# Altium PCB PCB1.PcbDoc
Units mil, origin at the board's own origin, x right, y up, seen from the top; angles counter-clockwise.
Board outline 6000 x 4000 mil, 2 copper layers (Top Layer, Bottom Layer); 50 components, 42 nets, 217 pads, 0 vias.
Unrouted connection lines stored in the file: 153.
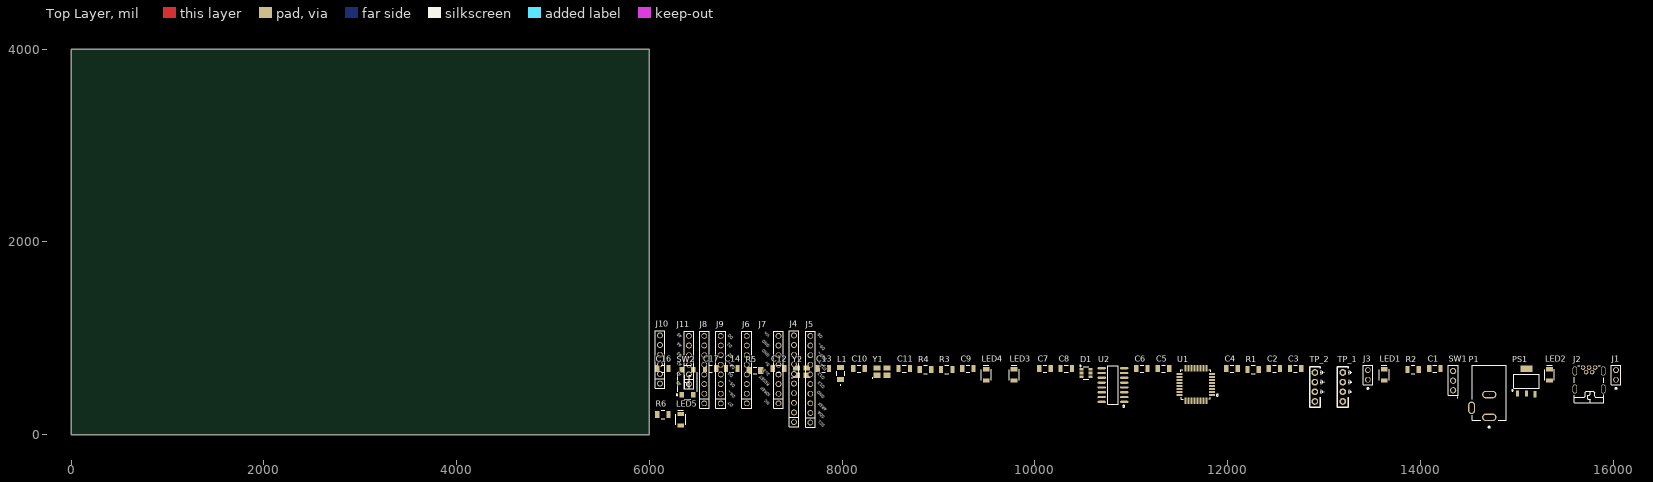
[diagram p0: Top Layer view]
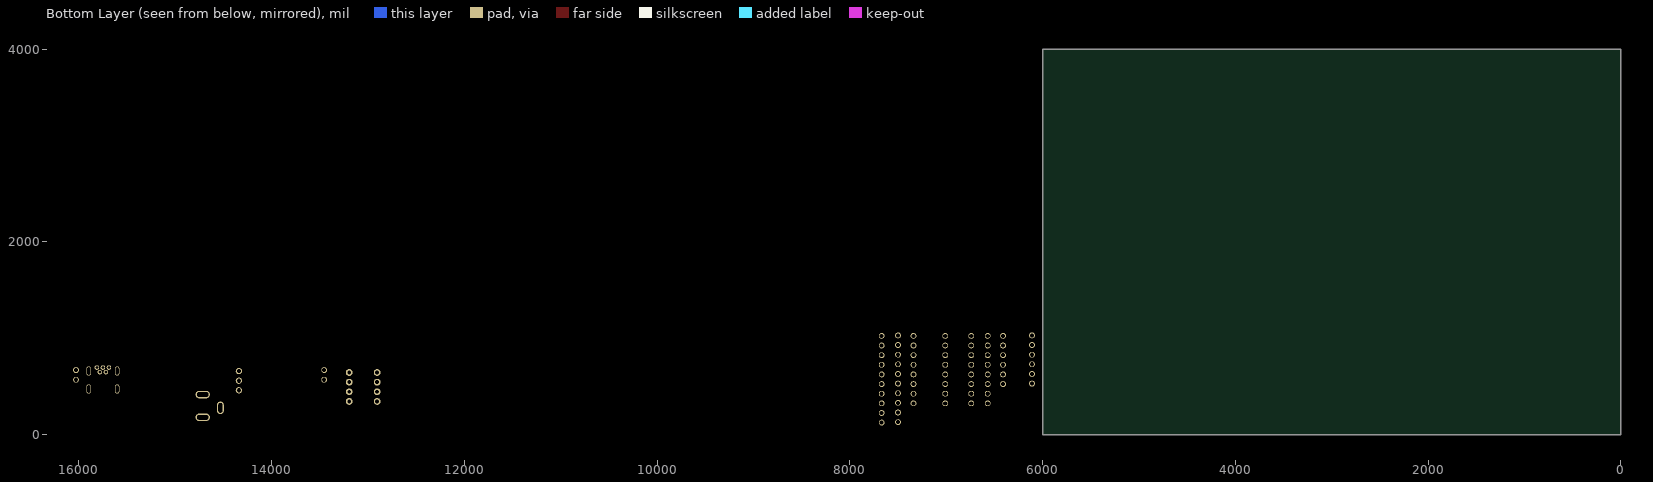
[diagram p1: Bottom Layer view, seen from below]

## Layer stack, top to bottom
Top Solder: solder mask 0.4, Solder Resist, Dk 3.5
Top Layer: signal copper 1.4
Dielectric 1: dielectric 12.6, FR-4, Dk 4.8
Bottom Layer: signal copper 1.4
Bottom Solder: solder mask 0.4, Solder Resist, Dk 3.5

## Board outline
0,0 6000,0 6000,4000 0,4000

## Design rules (kind name [scope] priority, off if disabled: settings)
Clearance [All] p1: gap=10 ignorepadtopadclearanceinfootprint=FALSE
PolygonConnect [All] p1: connectstyle=Relief reliefconductorwidth=10 reliefentries=4 polygonreliefangle="90 Angle" airgapwidth=10
RoutingVias [All] p1: holewidth=28 width=50 viastyle="Through Hole" minholewidth=28 minwidth=50 maxholewidth=28 maxwidth=50
SolderMaskExpansion [All] p1: expansion=4 istentingtop=FALSE
Width "Schematic Width Constraint_3" [InNet('5V_USB')] p1: maxlimit=30 minlimit=20 preferedwidth=20 minimp=50.000000 maximp=50.000000 favimp=50.000000
Width "Schematic Width Constraint_2" [InNet('3.3V')] p2: maxlimit=30 minlimit=20 preferedwidth=20 minimp=50.000000 maximp=50.000000 favimp=50.000000
Width "Schematic Width Constraint_1" [InNet('5V_JACK')] p3: maxlimit=30 minlimit=20 preferedwidth=20 minimp=50.000000 maximp=50.000000 favimp=50.000000
Width "Schematic Width Constraint" [InNet('5V')] p4: maxlimit=30 minlimit=20 preferedwidth=20 minimp=50.000000 maximp=50.000000 favimp=50.000000
Width [All] p5: maxlimit=10 minlimit=10 preferedwidth=10
30 further rules are at their usual default settings.

## Classes and differential pairs
component class Sheet2: J4 J5 J6 J7 J8 J9 J10 J11
component class Sheet1: C1 C2 C3 C4 C5 C6 C7 C8 C9 C10 C11 C12 C13 C14 C16 C17 D1 J1 J2 J3 L1 LED1 LED2 LED3 LED4 LED5 P1 PS1 R1 R2 R3 R4 R5 R6 SW1 SW2 TP_1 TP_2 U1 U2 Y1 Y2

## Components (designator, comment, footprint, x,y, rotation, side; value= is the part's Value field where it differs from the comment)
C1 "C_22uF_1206" 1206_Passive_Capacitor 14150,685 r0 top value=22µF
C2 "C_22uF_1206" 1206_Passive_Capacitor 12485,685 r0 top value=22µF
C3 "C_22uF_1206" 1206_Passive_Capacitor 12705,685 r0 top value=22µF
C4 "C_22uF_1206" 1206_Passive_Capacitor 12045,685 r0 top value=22µF
C5 "C_22uF_1206" 1206_Passive_Capacitor 11335,685 r0 top value=22µF
C6 "C_22uF_1206" 1206_Passive_Capacitor 11110,685 r0 top value=22µF
C7 "C_22uF_1206" 1206_Passive_Capacitor 10105,685 r0 top value=22µF
C8 "C_22uF_1206" 1206_Passive_Capacitor 10325,685 r0 top value=22µF
C9 "C_22uF_1206" 1206_Passive_Capacitor 9305,685 r0 top value=22µF
C10 "C_22uF_1206" 1206_Passive_Capacitor 8175,685 r0 top value=22µF
C11 "C_22uF_1206" 1206_Passive_Capacitor 8645,685 r0 top value=22µF
C12 "C_22uF_1206" 1206_Passive_Capacitor 7340,685 r0 top value=22µF
C13 "C_22uF_1206" 1206_Passive_Capacitor 7805,685 r0 top value=22µF
C14 "C_22uF_1206" 1206_Passive_Capacitor 6855,685 r0 top value=22µF
C16 "C_1uF_1206" 1206_Passive_Capacitor 6140,685 r0 top value=1µF
C17 "C_22uF_1206" 1206_Passive_Capacitor 6635,685 r0 top value=22µF
D1 "D_TVS_Diode" TVS 10530,640 r0 top value="TVS DIODE 5.5V 6TSOP"
J1 "JM_2_PIN_MALE" 2_PIN_100MIL 16030,620 r90 top value="2 PIN"
J2 "J_USB_B_Mini" USB_MINI_B 15750,585 r0 top value="USB mini B"
J3 "JM_2_PIN_MALE" 2_PIN_100MIL 13455,620 r90 top value="2 PIN"
J4 "JF_10_PIN_FEMALE_" "10_PIN_100MIL - Female" 7500,130 r90 top value=Female
J5 "JF_10_PIN_FEMA_ARDUINO" 10_PIN_ARDUINO_100MIL 7670,125 r90 top value=Female
J6 "JF_8_PIN_FEMALE" "8_PIN_100MIL - Female" 7010,325 r90 top value=Female
J7 "JF_8_PIN_FEMA_ARD-Pwr" 8_PIN_ARD-PWR_100MIL 7340,325 r90 top value=Female
J8 "JF_8_PIN_FEMALE" "8_PIN_100MIL - Female" 6570,325 r90 top value=Female
J9 "JF_8_PIN_FEMA_ARD-Dig" 8_PIN_ARD-DIG_100MIL 6740,325 r90 top value=Female
J10 "JF_6_PIN_FEMALE" "6_PIN_100MIL -Female" 6110,530 r90 top value=Female
J11 "JF_6_PIN_FEMA_ARD-Anolog" 6_PIN_ARD-Analog_100mil 6410,525 r90 top value=Female
L1 "FB_10uH_1206" AIML-1206_ABR-M 7985,635 r90 top
LED1 "LED_RED_1206" LED_1206 13625,620 r90 top value=Red
LED2 "LED_RED_1206" LED_1206 15340,620 r90 top value=Red
LED3 "LED_RED_1206" LED_1206 9785,620 r90 top value=Red
LED4 "LED_RED_1206" LED_1206 9495,620 r90 top value=Red
LED5 "LED_RED_1206" LED_1206 6325,155 r90 top value=Red
P1 "P_Power Jack" Power_Jack 14715,180 r90 top value="CONN PWR JACK 2X5.5MM SOLDER"
PS1 "PS_AMS_LDO_3v3" LDO 15100,555 r0 top value="IC REG LINEAR 3.3V 800MA SOT223"
R1 "R_1K_1206" 1206_Passive_Resitor 12265,675 r0 top value=1k
R2 "R_1K_1206" 1206_Passive_Resitor 13925,675 r0 top value=1k
R3 "R_1K_1206" 1206_Passive_Resitor 9085,675 r0 top value=1k
R4 "R_1K_1206" 1206_Passive_Resitor 8865,675 r0 top value=1k
R5 "Resistor 10k +/-1% 1206 250 mW" RESC3216X60X45ML15T20 7095,665 r0 top value=10k
R6 "R_1K_1206" 1206_Passive_Resitor 6140,210 r0 top value=1k
SW1 "SW_3Pin_100mil_Switch" 3_PIN_100mil 14340,460 r90 top value="CONN HEADER VERT 3POS 2.54MM"
SW2 "SW_Push_Button_JLC" Switch_JLC 6395,545 r90 top
TP_1 "TP_10x_Probe" TP10x_Probe 13195,495 r90 top
TP_2 "TP_10x_Probe" TP10x_Probe 12905,495 r90 top
U1 "U_ATMega328P" ATMega328P 11670,520 r0 top value="IC MCU 8BIT 32KB FLASH 32TQFP"
U2 "U_USBtoSerial" "USB to serial" 10810,515 r90 top value="USB to Serial"
Y1 "X_12MHz_Res" "Crystal resonator" 8415,655 r0 top value=12MHz
Y2 "X_16MHz_Res" "Crystal resonator" 7580,655 r0 top value=12MHz

## Footprints (in the part's own frame and the unit in brackets; to place one, negate y for a bottom-side part, rotate by r counter-clockwise, add the part's x,y. Pads: shape width x height; smd on the part's side, far side on the other; paste and mask are expansions set on the pad)
2_PIN_100MIL [mil]
  round 60 hole 43.31: 1(-50,0) 2(50,0)
  silkscreen extent -145,-50 100,50, body extent -100,-50 100,50, height 336
3_PIN_100mil [mm]
  round 1.65 hole 1.1: 1(0,0) 2(2.54,0) 3(5.08,0)
  silkscreen extent -2,-1.4 6.6,1.27, body extent -1.14,-1.27 6.48,1.27, height 8.38
"6_PIN_100MIL -Female" [mil]
  round 60 hole 43.31: 1(0,0) 2(100,0) 3(200,0) 4(300,0) 5(400,0) 6(500,0)
  silkscreen extent -50,-50 550,50, body extent -61,-53 559,47, height 335
6_PIN_ARD-Analog_100mil [mil]
  round 60 hole 43.31: 1(0,0) 2(100,0) 3(200,0) 4(300,0) 5(400,0) 6(500,0)
  silkscreen extent -50,-50 550,50, body extent -59,-49 561,51, height 335
"8_PIN_100MIL - Female" [mil]
  round 60 hole 43.31: 1(0,0) 2(100,0) 3(200,0) 4(300,0) 5(400,0) 6(500,0) 7(600,0) 8(700,0)
  silkscreen extent -50,-50 750,50, body extent -60,-51 760,49, height 335
8_PIN_ARD-DIG_100MIL [mil]
  round 60 hole 43.31: 1(0,0) 2(100,0) 3(200,0) 4(300,0) 5(400,0) 6(500,0) 7(600,0) 8(700,0)
  silkscreen extent -50,-50 750,50, body extent -60,-50 760,50, height 335
8_PIN_ARD-PWR_100MIL [mil]
  round 60 hole 43.31: 1(0,0) 2(100,0) 3(200,0) 4(300,0) 5(400,0) 6(500,0) 7(600,0) 8(700,0)
  silkscreen extent -50,-50 750,50, body extent -60,-50 760,50, height 335
"10_PIN_100MIL - Female" [mil]
  round 60 hole 43.31: 1(0,0) 2(100,0) 3(200,0) 4(300,0) 5(400,0) 6(500,0) 7(600,0) 8(700,0) 9(800,0) 10(900,0)
  silkscreen extent -50,-50 950,50, body extent -61,-50 959,50, height 335
10_PIN_ARDUINO_100MIL [mil]
  round 60 hole 43.31: 1(0,0) 2(100,0) 3(200,0) 4(300,0) 5(400,0) 6(500,0) 7(600,0) 8(700,0) 9(800,0) 10(900,0)
  silkscreen extent -50,-50 950,50, body extent -60,-49 960,51, height 335
1206_Passive_Capacitor [mil]
  rect 44x71 smd: 1(-59,0) 2(59,0)
  silkscreen extent -19,-35 19,35, body extent -63,-31 63,32, height 50
1206_Passive_Resitor [mil]
  rect 44x71 smd: 1(-59,0) 2(59,0)
  silkscreen extent -19,-45 19,45, body extent -61,-31 61,31, height 26
AIML-1206_ABR-M [mil]
  rect 54x73 smd paste+0 mask+0: 1(-61.5,0) 2(61.5,0)
  silkscreen extent -124,-40 22,40, body extent -66,-36 66,36, height 55
ATMega328P [mm]
  rect 1.65x0.508 smd mask+0.025: 1(4.28,-2.794) 2(4.28,-2.007) 3(4.28,-1.194) 4(4.28,-0.406) 5(4.28,0.406) 6(4.28,1.194) 7(4.28,2.007) 8(4.28,2.794) 17(-4.28,2.794) 18(-4.28,2.007) 19(-4.28,1.194) 20(-4.28,0.406) 21(-4.28,-0.406) 22(-4.28,-1.194) 23(-4.28,-2.007) 24(-4.28,-2.794)
  rect 0.508x1.65 smd mask+0.025: 9(2.843,4.28) 10(2.056,4.28) 11(1.243,4.28) 12(0.455,4.28) 13(-0.357,4.28) 14(-1.145,4.28) 15(-1.958,4.28) 16(-2.745,4.28) 25(-2.745,-4.28) 26(-1.958,-4.28) 27(-1.145,-4.28) 28(-0.357,-4.28) 29(0.455,-4.28) 30(1.243,-4.28) 31(2.056,-4.28) 32(2.843,-4.28)
  silkscreen extent -3.94,-3.81 5.97,3.94, body extent -4.45,-4.47 4.55,4.53, height 1.16
"Crystal resonator" [mm]
  rect 1.8x1.4 smd: 1(-1.32,-1.02) 2(1.32,-1.02) 3(1.32,0.92) 4(-1.32,0.92)
  silkscreen extent -2.63,-1.79 -2.45,-1.61, body extent -1.65,-1.2 1.65,1.2, height 0.8
LDO [mm]
  rect 0.838x1.7 smd: 1(-2.311,-3.25) 2(0,-3.25) 3(2.311,-3.5)
  rect 3.099x1.7 smd: 4(0,3.25)
  silkscreen extent -3.86,-2.62 3.35,1.85, body extent -3.25,-3.65 3.25,3.35, height 1.85
LED_1206 [mil]
  rect 44x71 smd: 1(-59,0) 2(59,0)
  silkscreen extent -54,-51 99,51, body extent -63,-31 63,31, height 28
Power_Jack [mm]
  oval 2x3.8 hole 1.2 slot 3 at 90 deg: 1(0,0) 2(6,0)
  oval 3.3x1.8 hole 1 slot 2.5 at 0 deg: 3(2.5,4.65)
  silkscreen extent -2.79,-4.5 13.68,4.5, body extent -0.76,-4.45 13.64,4.95, height 11.49
RESC3216X60X45ML15T20 [mm] "Chip Resistor, 2-Leads, Body 3.3x1.75mm, IPC Low Density"
  rect 1.35x1.85 smd: 1(-1.525,0) 2(1.525,0)
  silkscreen extent -0.45,-0.82 0.45,0.82, body extent -1.65,-0.87 1.65,0.87, height 0.6
Switch_JLC [mm]
  rect 1.5x1.2 smd: 1(-3.3,1.5) 2(3.3,1.5) 3(-3.3,-1.5) 4(3.3,-1.5)
  silkscreen extent -4.44,-2.54 4.45,3, body extent -3.8,-2.29 3.7,2.21, height 3.7
TP10x_Probe [mil] "Small Probs footprint"
  round 70 hole 40: 1(-150,0) 2(-50,0) 2(50,0) 2(150,0)
  silkscreen extent -210,-95 210,55
TVS [mm]
  rect 1x0.7 smd mask+0.025: 1(-1.162,0.95) 2(-1.162,0) 3(-1.162,-0.95) 4(1.2,-0.95) 5(1.2,0) 6(1.2,0.95)
  silkscreen extent -1.65,-1.63 0.76,2.03, body extent -1.37,-1.44 1.38,1.46, height 1.1
"USB to serial" [mil]
  oval 24x86.61 smd: 1(-175,-117) 2(-125,-117) 3(-75,-117) 4(-25,-117) 5(25,-117) 6(75,-117) 7(125,-117) 8(175,-117) 9(175,117) 10(125,117) 11(75,117) 12(25,117) 13(-25,117) 14(-75,117) 15(-125,117) 16(-175,117)
  silkscreen extent -231,-122 201,56, body extent -197,-118 197,118, height 71
USB_MINI_B [mm]
  round 1.2 hole 0.8: 1(-1.58,2.826) 2(-0.78,1.622) 3(0.02,2.826) 4(0.82,1.622) 5(1.62,2.826)
  oval 1.2x2.4 hole 0.8 slot 1.9 at 90 deg: 6(-3.72,1.924) 7(3.72,1.924) 8(-3.72,-2.826) 9(3.72,-2.826)
  silkscreen extent -3.89,-6.42 3.93,3.3, body extent -4.04,-6.83 4.06,3.02, height 3.98

## Part data
C1 C2 C3 C4 C6 C9 C10 C11 C12 C13 C17: library part CMP-001-00089-1, "22uF ±10% 25V X5R 1206 Multilayer Ceramic Capacitors MLCC - SMD/SMT RoHS", LCSC Part#=C12891, MFR Part #=CL31A226KAHNNNE, Component Type=Standard, Datasheet=https://datasheet.lcsc.com/lcsc/1811031514_Samsung-Electro-Mechanics-CL31A226KAHNNNE_C12891.pdf, Design Item ID=C_22uF_1206, Pins=2, Source=ECEN5730Lib_2023_05_DS.SchLib, Type=basic
C5 C7 C8 C14: library part CMP-001-00098-1, "22uF ±10% 25V X5R 1206 Multilayer Ceramic Capacitors MLCC - SMD/SMT RoHS", LCSC Part#=C12891, MFR Part #=CL31A226KAHNNNE, Component Type=Standard, Datasheet=https://datasheet.lcsc.com/lcsc/1811031514_Samsung-Electro-Mechanics-CL31A226KAHNNNE_C12891.pdf, Design Item ID=C_22uF_1206, Pins=2, Source=ECEN5730Lib_2023_05_DS.SchLib, Type=basic
C16: library part CMP-001-00095-1, "MULTILAYER CERAMIC CAPACITORS MLCC - SMD/SMT 1UF 50V 1206 ROHS", LCSC Part#=C1848, MFR Part #=CL31B105KBHNNNE, Component Type=Standard, Design Item ID=C_1uF_1206, Digikey Link=https://www.digikey.com/product-detail/en/C1206C105M4RACTU/399-8150-1-ND/3471873/?itemSeq=304982366, Pins=2, Source=ECEN5730Lib_2023_05_DS.SchLib, Type=Basic
D1: library part CMP-004-00031-1, "TVS SOT-23-6 ROHS", LCSC Part#=C85364, MFR Part #=SRV05-4-P-T7, Component Type=Standard, Datasheet=https://datasheet.lcsc.com/szlcsc/ProTek-Devices-SRV05-4-P-T7_C85364.pdf, Design Item ID=D_TVS_Diode, Pins=6, Source=ECEN5730Lib_2023_05_DS.SchLib, Type=Basic
J1 J3: library part CMP-002-00089-1, "2.54mm Straight 2 1 Header,Breakaway Through Hole,P=2.54mm Pin Header & Female Header ROHS", LCSC Part#=C124375, MFR Part #=B-2100S02P-A110, Component Type=Standard, Datasheet=https://datasheet.lcsc.com/lcsc/1811151421_Ckmtw-Shenzhen-Cankemeng-B-2100S02P-A110_C124375.pdf, Design Item ID=JM_2_PIN_MALE, Pins=2, Source=ECEN5730Lib_2023_05_DS.SchLib, Type=Extended
J2: library part CMP-013-000002-1, "Through Hole USB Connectors RoHS", LCSC Part#=C46398, MFR Part #=920-462A2021D10102, Component Type=Standard, Datasheet=https://datasheet.lcsc.com/szlcsc/2103081233_Jing-Extension-of-the-Electronic-Co-920-462A2021D10102_C46398.pdf, Design Item ID=J_USB_B_Mini, Pin Count=9, Source=ECEN5730Lib_2023_05_DS.SchLib, Type=Extended
J4: library part CMP-002-00103-1, "10 Position Header Connector 0.100\" (2.54mm) Through Hole Tin", LCSC Part#=C225507, MFR Part #=PPTC101LFBN-RC, Component Type=Standard, Design Item ID=JF_10_PIN_FEMALE_, Digikey Link=https://www.digikey.com/product-detail/en/PPTC101LFBN-RC/S7008-ND/810149/?itemSeq=304982352, Pins=10, Source=ECEN5730Lib_2023_05_DS.SchLib, Type=Extended
J5: library part CMP-002-00102-1, "10 Position Header Connector 0.100\" (2.54mm) Through Hole Tin", LCSC Part#=C225507, MFR Part #=PPTC101LFBN-RC, Component Type=Standard, Design Item ID=JF_10_PIN_FEMA_ARDUINO, Digikey Link=https://www.digikey.com/product-detail/en/PPTC101LFBN-RC/S7008-ND/810149/?itemSeq=304982352, Pins=10, Source=ECEN5730Lib_2023_05_DS.SchLib, Type=Extended
J6 J8: library part CMP-002-00113-1, "8 Position Header Connector 0.100\" (2.54mm) Through Hole Tin", LCSC Part#=C27438, MFR Part #=PPTC081LFBN-RC, Component Type=Standard, Design Item ID=JF_8_PIN_FEMALE, Digikey Link=https://www.digikey.com/product-detail/en/PPTC081LFBN-RC/S7006-ND/810147/?itemSeq=304982354, Pins=8, Source=ECEN5730Lib_2023_05_DS.SchLib, Type=Extended
J7: library part CMP-002-00112-1, "8 Position Header Connector 0.100\" (2.54mm) Through Hole Tin", LCSC Part#=C27438, MFR Part #=PPTC081LFBN-RC, Component Type=Standard, Design Item ID=JF_8_PIN_FEMA_ARD-Pwr, Digikey Link=https://www.digikey.com/product-detail/en/PPTC081LFBN-RC/S7006-ND/810147/?itemSeq=304982354, Pins=8, Source=ECEN5730Lib_2023_05_DS.SchLib, Type=Extended
J9: library part CMP-002-00111-1, "8 Position Header Connector 0.100\" (2.54mm) Through Hole Tin", LCSC Part#=C27438, MFR Part #=PPTC081LFBN-RC, Component Type=Standard, Design Item ID=JF_8_PIN_FEMA_ARD-Dig, Digikey Link=https://www.digikey.com/product-detail/en/PPTC081LFBN-RC/S7006-ND/810147/?itemSeq=304982354, Pins=8, Source=ECEN5730Lib_2023_05_DS.SchLib, Type=Extended
J10: library part CMP-002-00109-1, "6 Position Header Connector 0.100\" (2.54mm) Through Hole Tin", LCSC Part#=C40877, MFR Part #=PPTC061LFBN-RC, Component Type=Standard, Design Item ID=JF_6_PIN_FEMALE, Digikey Link=https://www.digikey.com/product-detail/en/PPTC061LFBN-RC/S7004-ND/810145/?itemSeq=304982353, Pins=6, Source=ECEN5730Lib_2023_05_DS.SchLib, Type=Extended
J11: library part CMP-002-00108-1, "6 Position Header Connector 0.100\" (2.54mm) Through Hole Tin", LCSC Part#=C40877, MFR Part #=PPTC061LFBN-RC, Component Type=Standard, Design Item ID=JF_6_PIN_FEMA_ARD-Anolog, Digikey Link=https://www.digikey.com/product-detail/en/PPTC061LFBN-RC/S7004-ND/810145/?itemSeq=304982353, Pins=6, Source=ECEN5730Lib_2023_05_DS.SchLib, Type=Extended
L1: library part CMP-006-00021-1, "25mA 10uH ±10% 800mO 1206  Inductors (SMD) ROHS", LCSC Part#=C1051, MFR Part #=CMI321609X100KT, Mfr_Name="FH (Guangdong Fenghua Advanced Tech)", Component Type=Standard, Datasheet=https://datasheet.lcsc.com/lcsc/1810311314_FH--Guangdong-Fenghua-Advanced-Tech-CMI321609X100KT_C1051.pdf, Design Item ID=FB_10uH_1206, Pins=2, Source=ECEN5730Lib_2023_05_DS.SchLib, Type=Basic
LED1 LED2 LED3 LED4 LED5: library part CMP-007-00045-1, "Red 621~631nm 1206 Light Emitting Diodes (LED) RoHS", LCSC Part#=C93133, MFR Part #=15-21/R6C-FQ1R1B/2T, Component Type=Standard, Datasheet=https://datasheet.lcsc.com/szlcsc/1811151241_Everlight-Elec-15-21-R6C-FQ1R1B-2T_C93133.pdf, Design Item ID=LED_RED_1206, Pins=2, Source=ECEN5730Lib_2023_05_DS.SchLib, Type=Extended
P1: library part CMP-002-00097-1, "Power Barrel Connector Jack 2.10mm ID (0.083\"), 5.50mm OD (0.217\") Through Hole, Right Angle", LCSC Part#=C136744, MFR Part #=PJ-102A, Component Type=Standard, Design Item ID="P_Power Jack", Digikey Link=https://www.digikey.com/product-detail/en/PJ-102A/CP-102A-ND/275425/?itemSeq=304982367, Pins=3, Source=ECEN5730Lib_2023_05_DS.SchLib, Type=Extended
PS1: library part CMP-017-000002-1, "LOW DROPOUT REGULATORS(LDO) POSITIVE FIXED 1.3V @ 800MA 15V 3.3V 1A SOT-223 ROHS", LCSC Part#=C6186, MFR Part #=AMS1117-3.3, Component Type=Standard, Design Item ID=PS_AMS_LDO_3v3, Pin Count=4, Source=ECEN5730Lib_2023_05_DS.SchLib, Type=Basic
R1 R2 R3 R4 R6: library part CMP-009-00194-1, "CHIP RESISTOR - SURFACE MOUNT 1KOHMS ±1% 1/4W 1206 ROHS", LCSC Part#=C4410, MFR Part #=RNCP1206FTD1K00CT, Component Type=Standard, Design Item ID=R_1K_1206, Digikey Link=https://www.digikey.com/product-detail/en/RNCP1206FTD1K00/RNCP1206FTD1K00CT-ND/2240675/?itemSeq=304982373, Pins=2, Source=ECEN5730Lib_2023_05_DS.SchLib, Type=Basic
R5: library part CMP-009-00016-5, "Chip Resistor, 10 KOhm, +/- 1%, 0.25 W, -55 to 155 degC, 1206 (3216 Metric)", Case/Package=1206, Max Operating Temperature=155°C, Min Operating Temperature=-55°C, Power=250mW, Tolerance=1%, Voltage Rating=200V, Mounting Technology=SM, Pins=2, RoHS Compliant=True
SW1: library part CMP-002-00126-1, "Connector Header Through Hole 3 position 0.100\" (2.54mm)", LCSC Part#=C49257, MFR Part #=PREC003SAAN-RC, Component Type=Standard, Design Item ID=SW_3Pin_100mil_Switch, Digikey Link=https://www.digikey.com/product-detail/en/PREC003SAAN-RC/S1012EC-03-ND/2774851/?itemSeq=304982371, Pins=3, Source=ECEN5730Lib_2023_05_DS.SchLib, Type=Extended
SW2: library part CMP-011-00014-1, "Tactile Switch SPST-NO Top Actuated Surface Mount", LCSC Part#=C2837550, MFR Part #=KH-4.5X4.5X4.3H-STM, Component Type=Standard, Datasheet=https://datasheet.lcsc.com/lcsc/2106081532_Shenzhen-Kinghelm-Elec-KH-4.5X4.5X4.3H-STM_C2837550.pdf, Design Item ID=SW_Push_Button_JLC, Pins=4, Source=ECEN5730Lib_2023_05_DS.SchLib, Type=Extended
TP_1 TP_2: library part CMP-016-000001-1, "Test Point 300 mil centers", Component Type=Standard, Design Item ID=TP_10x_Probe, Pin Count=2, Source=ECEN5730Lib_2023_05_DS.SchLib
U1: library part CMP-031-00012-1, "AVR AVR® ATmega Microcontroller IC 8-Bit 20MHz 32KB (16K x 16) FLASH 32-TQFP (7x7)", LCSC Part#=C14877, MFR Part #=ATMEGA328P-AU, Component Type=Standard, Design Item ID=U_ATMega328P, Digikey Link=https://www.digikey.com/product-detail/en/ATMEGA328P-ANR/ATMEGA328P-ANRCT-ND/2774230/?itemSeq=304982365, Pins=32, Source=ECEN5730Lib_2023_05_DS.SchLib, Type=Basic
U2: library part CMP-031-00016-1, "Transceiver USB 2.0 2Mbps SOP-16_150mil USB ICs RoHS", LCSC Part#=C14267, MFR Part #=CH340G, Component Type=Standard, Datasheet=https://datasheet.lcsc.com/lcsc/2008191806_WCH-Jiangsu-Qin-Heng-CH340G_C14267.pdf, Design Item ID=U_USBtoSerial, Pins=16, Source=ECEN5730Lib_2023_05_DS.SchLib, Type=Basic
Y1 Y2: library part CMP-003-00030-1, "SMD Crystal Resonators 12MHz ±10ppm SMD-3225_4P RoHS", LCSC Part#=C9002, MFR Part #=X322512MSB4SI, Component Type=Standard, Datasheet=https://datasheet.lcsc.com/szlcsc/Yangxing-Tech-X322512MSB4SI_C9002.pdf, Design Item ID=X_12MHz_Res, Pins=4, Source=ECEN5730Lib_2023_05_DS.SchLib, Type=Basic

## Nets (pads, with @x,y where several pads share a name; then routed paths per layer and width w, separated by ;. In a path a pad name is that pad's centre, name@x,y a point inside that pad or via, vN(x,y) a via of type N, cw(c..) or ccw(c..) an arc to the next point about the centre after c; other vN are vias at no path point)
3.3V: J3.1 J7.4 LED1.1 PS1.2 PS1.4 TP_2.1
5V: C6.1 C7.2 C8.2 J1.1 J7.2 J7.5 L1.2 LED2.1 R5.2 SW1.2 TP_1.1 U1.4 U1.6 U2.16
5V_JACK: C2.2 P1.1 SW1.1
5V_USB: C1.2 D1.5 J2.1 SW1.3
328_RX: J9.8 LED3.1 U1.30 U2.2
328_TX: J9.7 LED4.1 U1.31 U2.3
A0: J11.1 U1.23
A1: J11.2 U1.24
A2: J11.3 U1.25
A3: J11.4 U1.26
A4: J5.2 J11.5 U1.27
A5: J5.1 J11.6 U1.28
AVCC_5V: C5.2 C14.2 L1.1 U1.18
D2: J9.6 U1.32
D3: J9.5 U1.1
D4: J9.4 U1.2
D5: J9.3 U1.9
D6: J9.2 U1.10
D7: J9.1 U1.11
D8: J5.10 U1.12
D9: J5.9 U1.13
D10: J5.8 U1.14
D11: J5.7 U1.15
D12: J5.6 U1.16
D13: J5.5 LED5.1 U1.17
D+: D1.1 J2.3 U2.5
D-: D1.3 J2.2 U2.6
GND: C1.1 C2.1 C3.2 C4.2 C5.1 C6.2 C7.1 C8.1 C9.2 C10.1 C11.1 C12.1 C13.1 C14.1 C16.1 D1.2 J2.5 J4.1 J4.2 J4.3 J4.4 J4.5 J4.6 J4.7 J4.8 J4.9 J4.10 J5.3 J5.4 J6.1 J6.2 J6.3 J6.4 J6.5 J6.6 J6.7 J6.8 J7.6 J7.7 J8.1 J8.2 J8.3 J8.4 J8.5 J8.6 J8.7 J8.8 J10.1 J10.2 J10.3 J10.4 J10.5 J10.6 P1.2 P1.3 PS1.1 R1.1 R2.1 R3.1 R4.1 R6.1 SW2.2 TP_1.2 TP_2.2 U1.3 U1.5 U1.20 U1.21 U2.1 Y1.2 Y1.4 Y2.2 Y2.4
NetC3_1: C3.1 J1.2 PS1.3
NetC4_1: C4.1 J3.2
NetC9_1: C9.1 U2.4
NetC10_2: C10.2 U2.7 Y1.1
NetC11_2: C11.2 U2.8 Y1.3
NetC12_2: C12.2 U1.7 Y2.1
NetC13_2: C13.2 U1.8 Y2.3
NetLED1_2: LED1.2 R1.2
NetLED2_2: LED2.2 R2.2
NetLED3_2: LED3.2 R3.2
NetLED4_2: LED4.2 R4.2
NetLED5_2: LED5.2 R6.2
RESET_CH340: C17.2 U2.13
RESET_PIN: C16.2 C17.1 J7.3 R5.1 SW2.4 U1.29
pads on no net: D1.4 D1.6 J2.4 J2.6 J2.7 J2.8 J2.9 J7.1 J7.8 SW2.1 SW2.3 U1.19 U1.22 U2.9 U2.10 U2.11 U2.12 U2.14 U2.15

## Text inside footprints (layer, text, board x,y; h text height)
J5: Top Overlay "D8" at 7805.59,1014 h30 r135; Top Overlay "D9~" at 7830.33,891 h30 r135; Top Overlay "D10~" at 7848,782 h30 r135; Top Overlay "D11~" at 7844.47,681 h30 r135; Top Overlay "D12" at 7823.26,588 h30 r135; Top Overlay "D13" at 7823.26,497 h30 r135; Top Overlay "GND" at 7826.79,391 h30 r135; Top Overlay "AREF" at 7848,264 h30 r135; Top Overlay "SDA" at 7826.79,188 h30 r135; Top Overlay "SCL" at 7826.79,96 h30 r135
J7: Top Overlay "RESET" at 7252.93,525 h30 r135; Top Overlay "Vin" at 7252.93,1025 h30 r135; Top Overlay "GND" at 7252.93,925 h30 r135; Top Overlay "GND" at 7252.93,825 h30 r135; Top Overlay "5v" at 7252.93,725 h30 r135; Top Overlay "3v3" at 7252.93,625 h30 r135; Top Overlay "IOREF" at 7261.61,415 h30 r135; Top Overlay "NC" at 7252.93,325 h30 r135
J9: Top Overlay "D7" at 6873.19,306 h30 r135; Top Overlay "D6~" at 6897.93,396 h30 r135; Top Overlay "D4" at 6875,612 h30 r135; Top Overlay "D3~" at 6895,696 h30 r135; Top Overlay "D2" at 6873,809 h30 r135; Top Overlay "D1" at 6865,916 h30 r135; Top Overlay "D0" at 6873.19,1006 h30 r135; Top Overlay "D5~" at 6897.93,506 h30 r135
J11: Top Overlay "A5" at 6340.93,1023 h30 r135; Top Overlay "A4" at 6340.93,923 h30 r135; Top Overlay "A3" at 6340.93,823 h30 r135; Top Overlay "A2" at 6340.93,723 h30 r135; Top Overlay "A0" at 6338,523 h30 r135; Top Overlay "A1" at 6338,623 h30 r135